# Altium PCB FreidoraAireCukiMicro_mirrored.PcbDoc
Units mm, origin at the board's own origin, x right, y up, seen from the top; angles counter-clockwise.
Board outline 92.71 x 72.39 mm, 2 copper layers (Top Layer, Bottom Layer); 65 components, 96 nets, 249 pads, 28 vias.
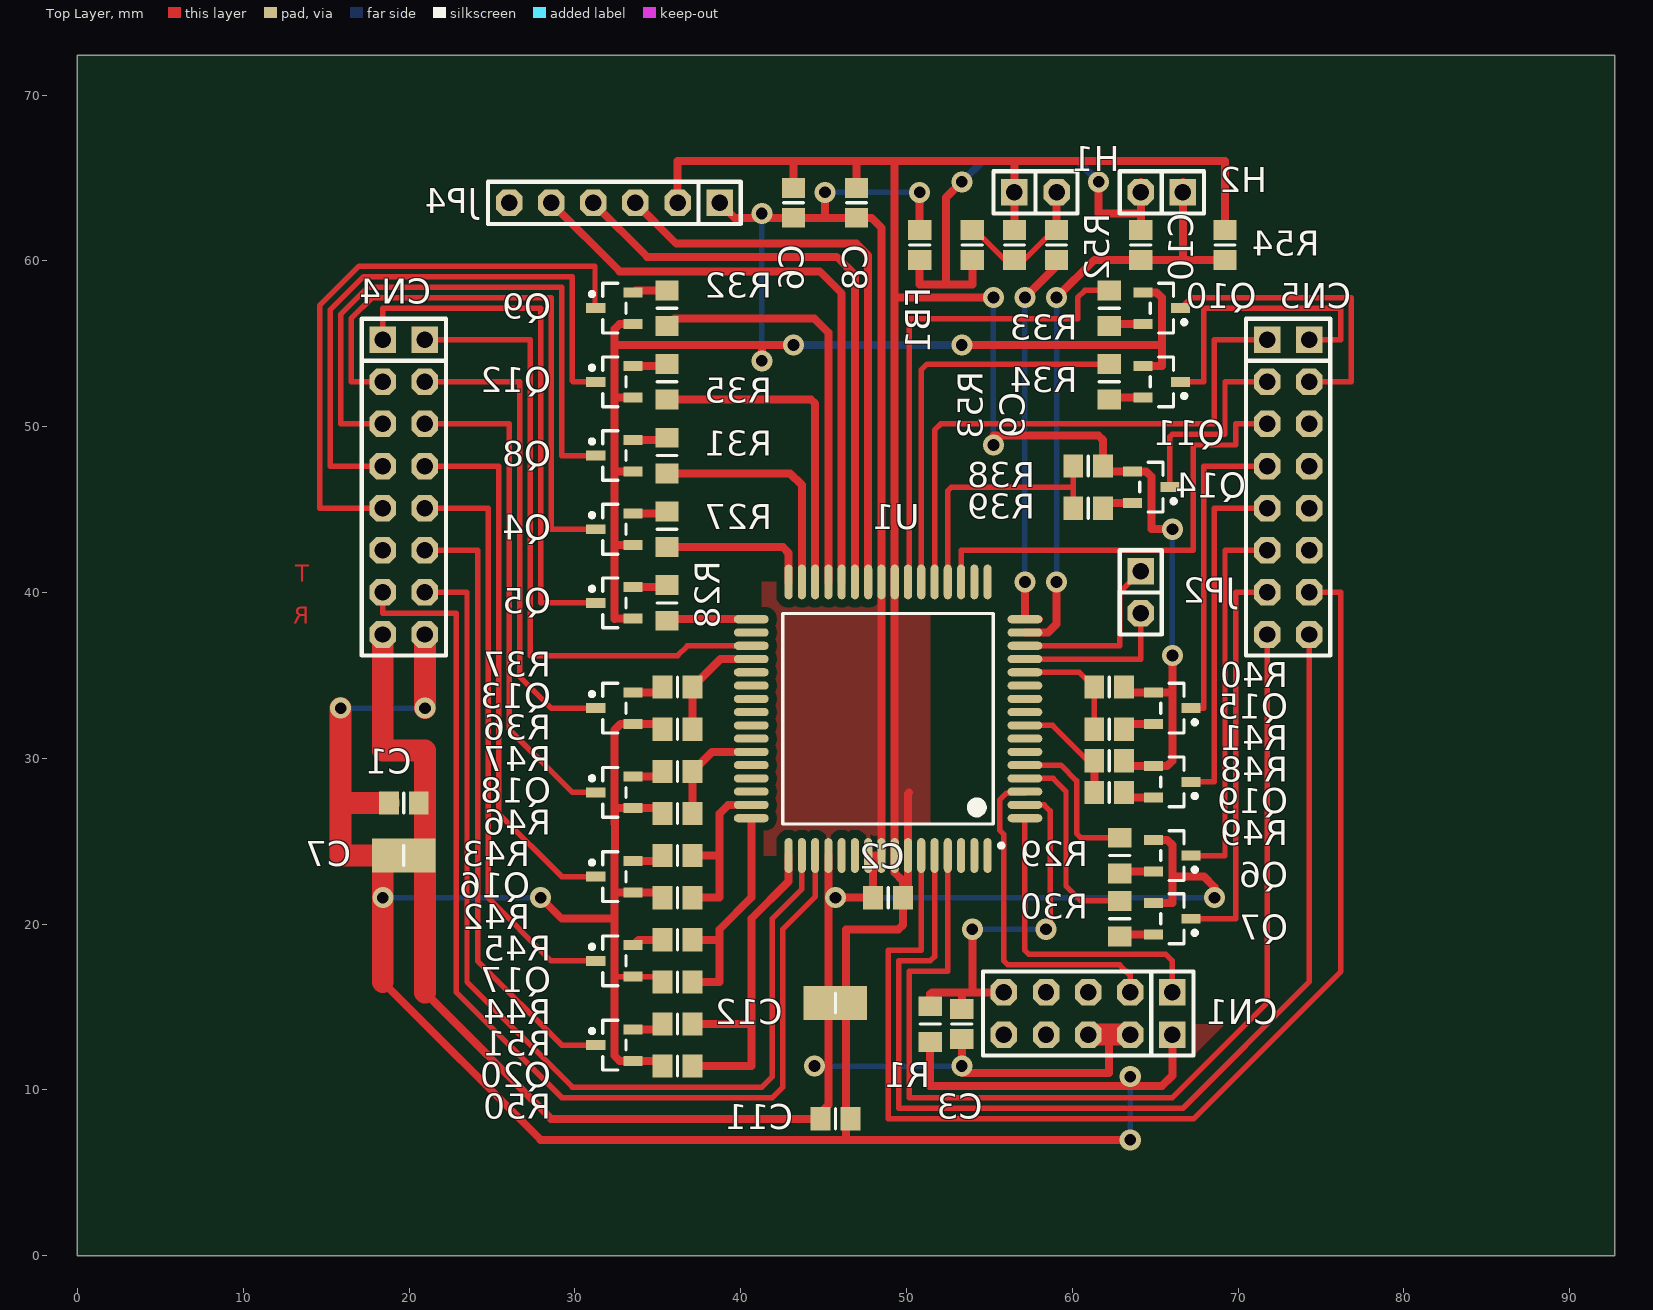
[diagram p0: Top Layer view]
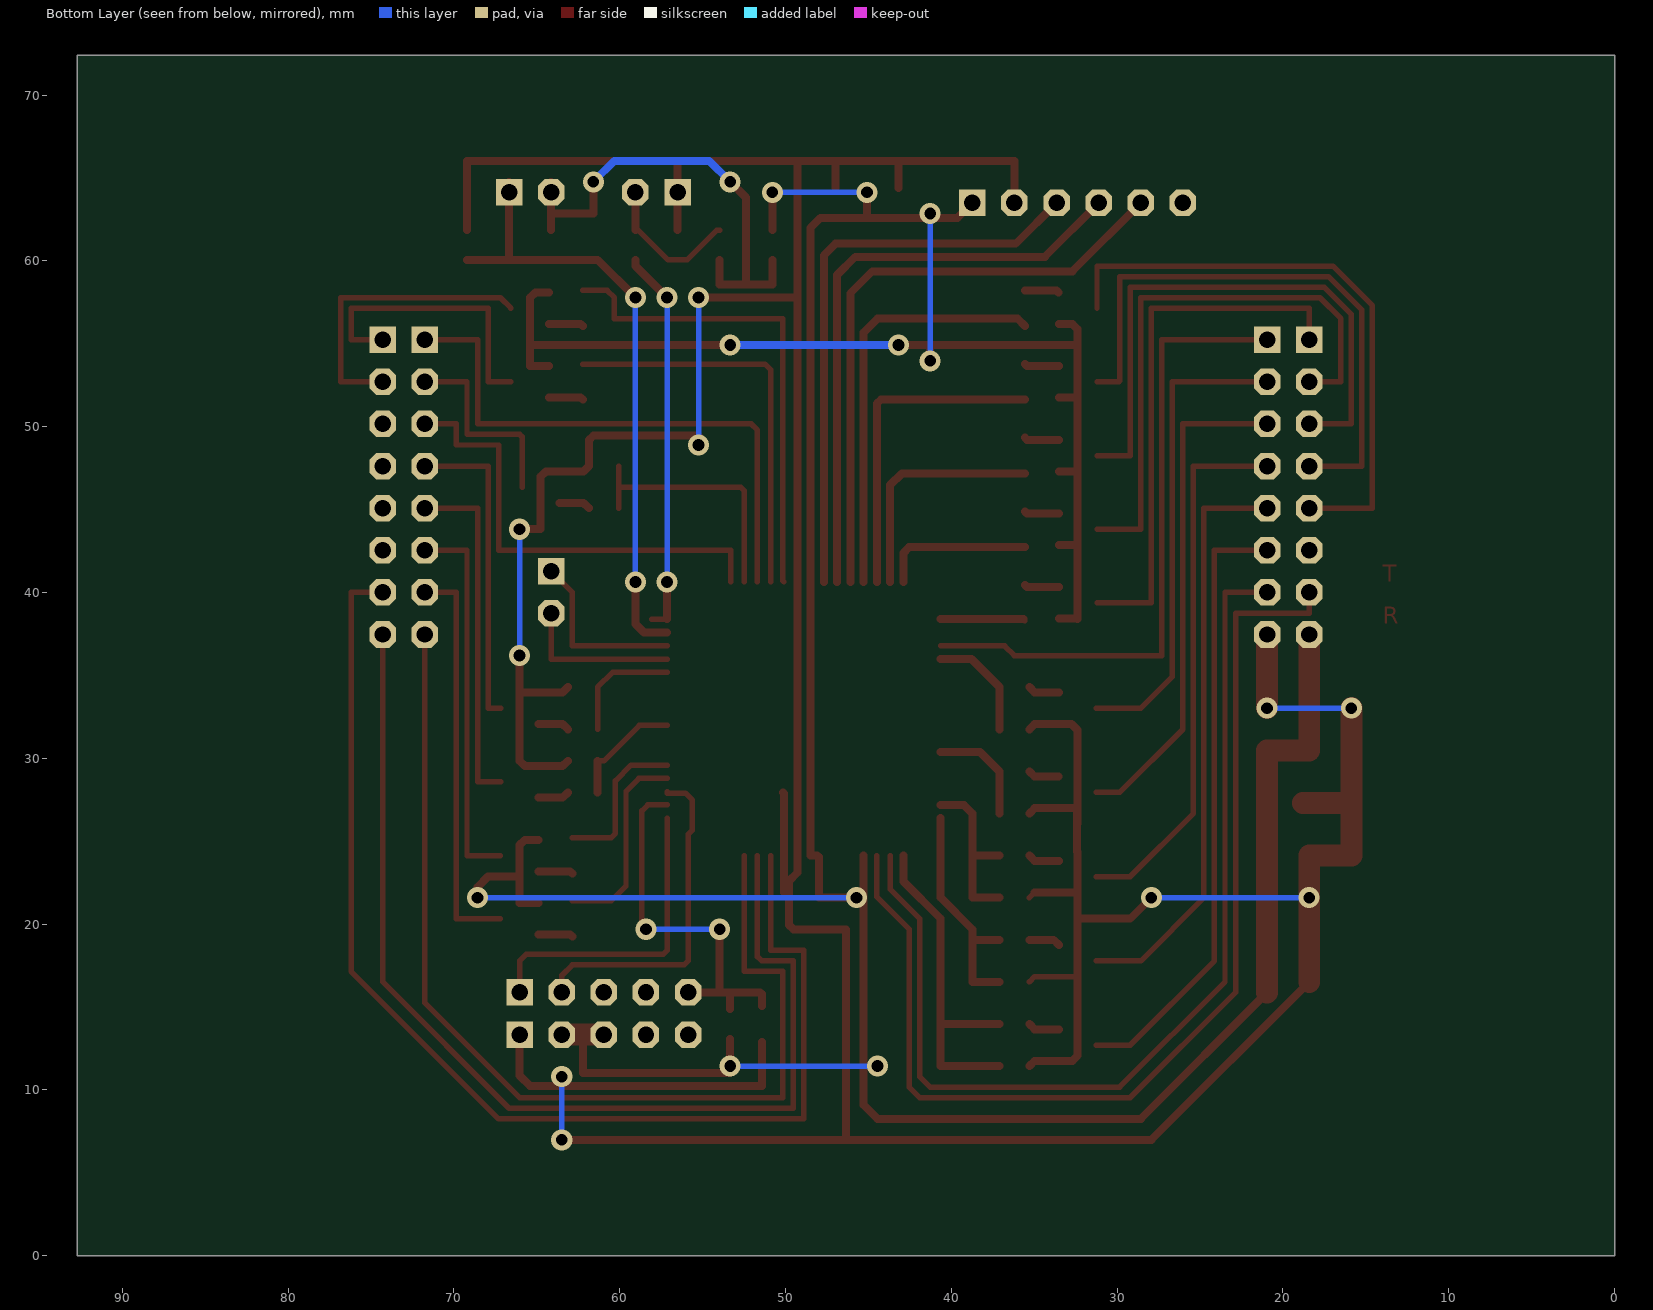
[diagram p1: Bottom Layer view, seen from below]

## Layer stack, top to bottom
Top Solder: solder mask 0.0102, Solder Resist, Dk 3.5
Top Layer: signal copper 0.0356
Dielectric1: dielectric 0.32, FR-4, Dk 4.8
Bottom Layer: signal copper 0.0356
Bottom Solder: solder mask 0.0102, Solder Resist, Dk 3.5

## Board outline
0,0 92.71,0 92.71,72.39 0,72.39

## Design rules (kind name [scope] priority, off if disabled: settings)
Clearance POLIGONOS [InPoly] p1: gap=0.508
Clearance [All] p2: gap=0.305
Clearance Clearance_1 [All] p3 off: gap=0.254
ComponentClearance [All] p1 off: gap=0.254 collisioncheckmode=3 verticalgap=0.254 showdistances=FALSE
FabricationTestPointUsage TestPointUsage [All] p1 off: valid=0 allowmultiple=FALSE
FabricationTestpoint Testpoint [All] p1: side=3 testpointundercomponent=TRUE minsize=1.016 maxsize=2.54 preferedsize=1.524 minholesize=0 maxholesize=1.016 preferedholesize=0.813 testpointgrid=0.025 allowsidetop=TRUE allowsidebottom=TRUE usegrid=TRUE gridtolerance=0
HoleSize [All] p1: absolutevalues=TRUE maxlimit=5.08 minlimit=0.025 maxpercent=80.000 minpercent=20.000
MinimumSolderMaskSliver [All] p1 off: minsoldermaskwidth=0.254
PlaneConnect [All] p1: planeconnectstyle=Relief reliefexpansion=0.508 reliefentries=4 reliefconductorwidth=0.356 reliefairgap=0.254
PolygonConnect [All] p1: connectstyle=Relief reliefconductorwidth=0.254 reliefentries=4 polygonreliefangle="90 Angle" airgapwidth=0.254
RoomDefinition FreidoraAireCukiDigLeds [InComponentClass('FreidoraAireCukiDigLeds')] p1: confinementstyle=ConfineIn formatcopy=TRUE lockcomponents=FALSE outline -271.145,-249.555 -220.345,-249.555 -220.345,-224.155 -271.145,-224.155
RoomDefinition FreidoraAireCukiMicro [InComponentClass('FreidoraAireCukiMicro')] p2: confinementstyle=ConfineIn formatcopy=TRUE lockcomponents=FALSE outline -5.08,-5.715 97.155,-5.715 97.155,74.93 -5.08,74.93
RoutingCorners [All] p1: cornerstyle=45-Degree minsetback=0.635 maxsetback=2.54
RoutingLayers [All] p1: top layer_v5=FALSE bottom layer_v5=FALSE
RoutingPriority [All] p1: routingpriority=2
RoutingVias [All] p1: holewidth=0.711 width=1.27 viastyle="Through Hole" minholewidth=0.711 minwidth=1.27 maxholewidth=0.711 maxwidth=1.397
ShortCircuit [All] p1 off: allowed=FALSE
SilkToSilkClearance [All] p1 off: silktosilkclearance=0.254
SilkToSolderMaskClearance SilkscreenOverComponentPads [IsPad] p1 off: minsilkscreentomaskgap=0.254 clearancetoexposedcopper=TRUE
SolderMaskExpansion [All] p1: expansion=0.102
Width "Width 39" [All] p1 off: maxlimit=7.62 minlimit=0.33 preferedwidth=0.991
Width "Width 96" [All] p2 off: maxlimit=7.62 minlimit=0.305 preferedwidth=2.438
Width "Width 19" [All] p3: maxlimit=7.62 minlimit=0.305 preferedwidth=0.483
Width "Width 300" [All] p4 off: maxlimit=7.62 minlimit=0.254 preferedwidth=7.62
Width "Width 12" [All] p5 off: maxlimit=7.62 minlimit=0.254 preferedwidth=0.305
Width "Width 65" [All] p6 off: maxlimit=7.62 minlimit=0.254 preferedwidth=1.651
Width "Width 150" [All] p7 off: maxlimit=7.62 minlimit=0.254 preferedwidth=3.81
Width "Width 26" [All] p8 off: maxlimit=7.62 minlimit=0.254 preferedwidth=0.66
Width "Width 13" [All] p9 off: maxlimit=7.62 minlimit=0.254 preferedwidth=0.33
Width "Width 52" [All] p10 off: maxlimit=7.62 minlimit=0.254 preferedwidth=1.321
18 further rules are at their usual default settings.

## Components (designator, comment, footprint, x,y, rotation, side; value= is the part's Value field where it differs from the comment)
C1 "100nF" C-0805_N#1 19.685,27.305 r0 top
C2 "100nF" C-0805_N#1 48.895,21.59 r180 top
C3 "1uF" C-0805_N#1 53.34,13.97 r270 top
C6 "100nF" C-0805_N#1 43.18,63.5 r270 top
C7 "100nF" C-0805_N#2 19.685,24.13 r0 top
C8 "100nF" C-0805_N#1 46.99,63.5 r270 top
C9 "100nF" C-0805_N#1 56.515,60.96 r90 top
C10 "100nF" C-0805_N#1 64.135,60.96 r270 top
C11 "10uF" C-0805_N#1 45.72,8.255 r0 top
C12 "10uF" C-0805_N#2 45.72,15.24 r0 top
CN1 "HEADER 2x5" SIP2X5 66.04,13.335 r0 top
CN4 "HEADER 8X2" SIP2X8 20.955,55.245 r90 top
CN5 "HEADER 8X2" SIP2X8 74.295,55.245 r90 top
FB1 "Ferrite bead" C-0805_N#1 50.8,60.96 r270 top
H1 "NTC 100K" SIP2 56.515,64.135 r0 top
H2 "NTC 10K" SIP2 66.675,64.135 r180 top
JP2 "UART1" SIP2 64.135,41.275 r270 top
JP4 "HEADER 6" SIP6 38.735,63.5 r180 top
Q4 "BC847" SOT23_N 32.385,43.815 r180 top
Q5 "BC847" SOT23_N 32.385,39.37 r180 top
Q6 "BC847" SOT23_N 66.04,24.13 r0 top
Q7 "BC847" SOT23_N 66.04,20.32 r0 top
Q8 "BC847" SOT23_N 32.385,48.26 r180 top
Q9 "BC847" SOT23_N 32.385,57.15 r180 top
Q10 "BC847" SOT23_N 65.405,57.15 r0 top
Q11 "BC847" SOT23_N 65.405,52.705 r0 top
Q12 "BC847" SOT23_N 32.385,52.705 r180 top
Q13 "BC857" SOT23_N 32.385,33.02 r180 top
Q14 "BC857" SOT23_N 64.77,46.355 r0 top
Q15 "BC857" SOT23_N 66.04,33.02 r0 top
Q16 "BC857" SOT23_N 32.385,22.86 r180 top
Q17 "BC857" SOT23_N 32.385,17.78 r180 top
Q18 "BC857" SOT23_N 32.385,27.94 r180 top
Q19 "BC857" SOT23_N 66.04,28.575 r0 top
Q20 "BC857" SOT23_N 32.385,12.7 r180 top
R1 "10k" R-0805_N_WAVE 51.435,13.97 r270 top
R27 "4k7" R-0805_N_WAVE 35.56,43.815 r270 top
R28 "4k7" R-0805_N_WAVE 35.56,39.37 r270 top
R29 "4k7" R-0805_N_WAVE 62.865,24.13 r90 top
R30 "4k7" R-0805_N_WAVE 62.865,20.32 r90 top
R31 "4k7" R-0805_N_WAVE 35.56,48.26 r270 top
R32 "4k7" R-0805_N_WAVE 35.56,57.15 r270 top
R33 "4k7" R-0805_N_WAVE 62.23,57.15 r90 top
R34 "4k7" R-0805_N_WAVE 62.23,52.705 r90 top
R35 "4k7" R-0805_N_WAVE 35.56,52.705 r270 top
R36 "4k7" R-0805_N 36.195,31.75 r180 top
R37 "4k7" R-0805_N 36.195,34.29 r180 top
R38 "4k7" R-0805_N 60.96,47.625 r0 top
R39 "4k7" R-0805_N 60.96,45.085 r0 top
R40 "4k7" R-0805_N 62.23,34.29 r0 top
R41 "4k7" R-0805_N 62.23,31.75 r0 top
R42 "4k7" R-0805_N 36.195,21.59 r180 top
R43 "4k7" R-0805_N 36.195,24.13 r180 top
R44 "4k7" R-0805_N 36.195,16.51 r180 top
R45 "4k7" R-0805_N 36.195,19.05 r180 top
R46 "4k7" R-0805_N 36.195,26.67 r180 top
R47 "4k7" R-0805_N 36.195,29.21 r180 top
R48 "4k7" R-0805_N 62.23,29.845 r0 top
R49 "4k7" R-0805_N 62.23,27.94 r0 top
R50 "4k7" R-0805_N 36.195,11.43 r180 top
R51 "4k7" R-0805_N 36.195,13.97 r180 top
R52 "680" R-0805_N 59.055,60.96 r270 top
R53 "10K" R-0805_N 53.975,60.96 r90 top
R54 "10K" R-0805_N 69.215,60.96 r90 top
U1 "MKE02Z64VQH4" QFP64 48.895,32.385 r90 top

## Footprints (in the part's own frame and the unit in brackets; to place one, negate y for a bottom-side part, rotate by r counter-clockwise, add the part's x,y. Pads: shape width x height; smd on the part's side, far side on the other; paste and mask are expansions set on the pad)
C-0805_N#1 [mm] "Chip Capacitor, Body 2.0x1.2mm, IPC Medium Density"
  rect 1.2x1.4 smd: 1(-0.9,0) 2(0.9,0)
  silkscreen extent 0,-0.6 0,0.6, body extent -1.1,-0.73 1.1,0.72, height 1.34
C-0805_N#2 [mm] "Chip Capacitor, Body 2.0x1.2mm, IPC Medium Density"
  rect 2.032x2.032 smd: 1(-0.9,0) 2(0.9,0)
  silkscreen extent 0,-0.6 0,0.6, body extent -1.1,-0.73 1.1,0.72, height 1.34
QFP64 [mm] "QFP, 64-Leads, Body 14x14mm, Pitch 0.8mm, IPC Medium Density"
  oval 2.1x0.489 smd: 1(-8.25,-6) 2(-8.25,-5.2) 3(-8.25,-4.4) 4(-8.25,-3.6) 5(-8.25,-2.8) 6(-8.25,-2) 7(-8.25,-1.2) 8(-8.25,-0.4) 9(-8.25,0.4) 10(-8.25,1.2) 11(-8.25,2) 12(-8.25,2.8) 13(-8.25,3.6) 14(-8.25,4.4) 15(-8.25,5.2) 16(-8.25,6) 33(8.25,6) 34(8.25,5.2) 35(8.25,4.4) 36(8.25,3.6) 37(8.25,2.8) 38(8.25,2) 39(8.25,1.2) 40(8.25,0.4) 41(8.25,-0.4) 42(8.25,-1.2) 43(8.25,-2) 44(8.25,-2.8) 45(8.25,-3.6) 46(8.25,-4.4) 47(8.25,-5.2) 48(8.25,-6)
  oval 0.489x2.1 smd: 17(-6,8.25) 18(-5.2,8.25) 19(-4.4,8.25) 20(-3.6,8.25) 21(-2.8,8.25) 22(-2,8.25) 23(-1.2,8.25) 24(-0.4,8.25) 25(0.4,8.25) 26(1.2,8.25) 27(2,8.25) 28(2.8,8.25) 29(3.6,8.25) 30(4.4,8.25) 31(5.2,8.25) 32(6,8.25) 49(6,-8.25) 50(5.2,-8.25) 51(4.4,-8.25) 52(3.6,-8.25) 53(2.8,-8.25) 54(2,-8.25) 55(1.2,-8.25) 56(0.4,-8.25) 57(-0.4,-8.25) 58(-1.2,-8.25) 59(-2,-8.25) 60(-2.8,-8.25) 61(-3.6,-8.25) 62(-4.4,-8.25) 63(-5.2,-8.25) 64(-6,-8.25)
  silkscreen extent -7.77,-6.95 6.35,6.35, body extent -7.9,-7.9 7.9,7.9, height 3.03
R-0805_N [mm] "Chip Resistor, Body 2.0x1.2mm, IPC Medium Density"
  rect 1.2x1.4 smd: 1(-0.9,0) 2(0.9,0)
  silkscreen extent 0,-0.6 0,0.6, body extent -1.1,-0.68 1.1,0.67, height 0.69
R-0805_N_WAVE [mm] "Chip Resistor, Body 2.0x1.2mm, IPC Medium Density, Wave soldering"
  rect 1.2x1.4 smd: 1(-1.075,0) 2(1.075,0)
  silkscreen extent 0,-0.6 0,0.6, body extent -1.1,-0.68 1.1,0.67, height 0.69
SIP2 [mil]
  rect 63x63 hole 39: 1(0,0)
  oct 63x63 hole 39: 2(100,0)
  silkscreen extent -50,-50 150,50
SIP2X5 [mil]
  rect 63x63 hole 39: 1(0,0) 2(0,100)
  oct 63x63 hole 39: 3(-100,0) 4(-100,100) 5(-200,0) 6(-200,100) 7(-300,0) 8(-300,100) 9(-400,0) 10(-400,100)
  silkscreen extent -450,-50 50,150, body extent -450,-48 50,148, height 336
SIP2X8 [mil]
  rect 63x63 hole 39: 1(0,0) 2(0,100)
  oct 63x63 hole 39: 3(-100,0) 4(-100,100) 5(-200,0) 6(-200,100) 7(-300,0) 8(-300,100) 9(-400,0) 10(-400,100) 11(-500,0) 12(-500,100) 13(-600,0) 14(-600,100) 15(-700,0) 16(-700,100)
  silkscreen extent -750,-50 50,150
SIP6 [mil]
  rect 63x63 hole 39: 1(0,0)
  oct 63x63 hole 39: 2(100,0) 3(200,0) 4(300,0) 5(400,0) 6(500,0)
  silkscreen extent -50,-50 550,50
SOT23_N [mm] "SOT23, 3-Leads, Body 2.9x1.3mm, Pitch 0.95mm, Lead Span 2.3mm - Reverse Pinning, IPC Medium Density"
  rect 1.15x0.6 smd: 1(-1.125,-0.95) 2(-1.125,0.95) 3(1.125,0)
  silkscreen extent -0.7,-1.5 1.47,1.5, body extent -1.4,-1.45 1.4,1.45, height 1.29

## Part data
C1 C2 C3 C6 C7 C8 C9 C10 C11 C12: library part CAP, "Non polarized capacitor"
CN1: library part "HEADER 5X2"
CN4 CN5: "HEADER DE 2 X8"
H1 H2 JP2: library part "HEADER 2"
Q4 Q5 Q6 Q7 Q8 Q9 Q10 Q11 Q12: "NPN transistor bipolar"
Q13 Q14 Q15 Q16 Q17 Q18 Q19 Q20: "PNP bipolar transistor"
R1 R27 R28 R29 R30 R31 R32 R33 R34 R35 R36 R37 R38 R39 R40 R41 R42 R43 R44 R45 R46 R47 R48 R49 R50 R51 R52 R53 R54: library part "Res SMD 0805", "Resistor SMD 0805"
U1: "IC MCU 32BIT 64KB FLASH 64QFP"

## Via types
v1: diameter 1.27, hole 0.711, Top Layer to Bottom Layer, 28 vias

## Nets (pads, with @x,y where several pads share a name; then routed paths per layer and width w, separated by ;. In a path a pad name is that pad's centre, name@x,y a point inside that pad or via, vN(x,y) a via of type N, cw(c..) or ccw(c..) an arc to the next point about the centre after c; other vN are vias at no path point)
A: R36.1 R37.1 U1.29 | length 6.8
  Top Layer w0.483: R36.1 R37.1 38.79,35.985 U1.29
AGND: C10.1 FB1.2 H2.2 R53.1 | length 29.4
  Top Layer w0.483: FB1.2 50.8,58.572 52.388,58.572 ; v1(53.34,64.77) 52.388,63.817 52.388,58.572 ; R53.1 53.975,58.572 52.388,58.572 ; v1(61.595,64.77) 61.595,62.865 64.135,62.865 ; C10.1 64.135,62.865 ; H2.2@64.135,64.77 64.135,62.865
  Bottom Layer w0.483: v1(53.34,64.77) 54.61,66.04 60.325,66.04 v1(61.595,64.77)
B: R38.1 R39.1 U1.45 | length 15.7
  Top Layer w0.33: U1.45 52.495,46.145 52.705,46.355 60.06,46.355 ; R39.1 60.06,46.355 ; R38.1 60.06,46.355
BAJAR: CN4.14 U1.14 | length 65.9
  Top Layer w0.33: CN4.14 18.415,38.735 22.86,38.735 22.86,15.875 29.21,9.525 41.91,9.525 42.55,10.165 42.55,19.69 44.495,21.635 U1.14
BUZZER: JP4.3 U1.39 | length 35
  Top Layer w0.483: JP4.3 36.119,61.036 46.99,61.036 47.695,60.331 U1.39
C: R40.1 R41.1 U1.53 | length 7.1
  Top Layer w0.33: U1.53 60.435,35.185 R40.1 R41.1
D: R42.1 R43.1 U1.18 | length 10.5
  Top Layer w0.483: R42.1 38.735,21.59 38.735,24.13 ; R43.1 38.735,24.13 ; U1.18 39.25,27.185 38.735,26.67 38.735,24.13
DIG1: 
DIG2: 
DIG3: 
DIGITO1: CN4.1 U1.30 | length 39
  Top Layer w0.33: CN4.1 27.305,55.245 27.305,36.195 36.195,36.195 36.785,36.785 U1.30
DIGITO2: CN5.2 U1.44 | length 34.5
  Top Layer w0.33: U1.44 51.695,49.79 52.07,50.165 68.58,50.165 68.58,55.245 CN5.2
DIGITO3: CN5.6 U1.46 | length 28
  Top Layer w0.33: U1.46 53.295,42.545 67.31,42.545 67.31,48.895 69.85,48.895 69.85,50.165 CN5.6
DP: R50.1 R51.1 U1.16 | length 20.7
  Top Layer w0.483: R50.1 40.64,11.43 40.64,13.97 ; R51.1 40.64,13.97 ; U1.16 42.895,22.575 40.64,20.32 40.64,13.97
E: R44.1 R45.1 U1.17 | length 13.9
  Top Layer w0.483: R44.1 38.735,16.51 38.735,19.05 ; R45.1 38.735,19.05 ; U1.17 40.645,21.595 38.735,19.685 38.735,19.05
F: R46.1 R47.1 U1.22 | length 6.6
  Top Layer w0.483: R46.1 R47.1 38.27,30.385 U1.22
FAN: JP4.4 U1.38 | length 36.7
  Top Layer w0.483: JP4.4@31.115,62.941 JP4.4 34.366,60.249 45.796,60.249 46.895,59.15 U1.38
G: R48.1 R49.1 U1.57 | length 7
  Top Layer w0.33: U1.57 58.82,31.985 60.96,29.845 R48.1
  Top Layer w0.483: R49.1 R48.1
GND: C1.2 C2.2 C3.2 C6.2 C7.2 C8.2 C11.1 C12.1 CN1.3 CN1.5 CN4.16 FB1.1 JP4.1 Q4.2 Q5.2 Q6.2 Q7.2 Q8.2 Q9.2 Q10.2 Q11.2 Q12.2 U1.9 U1.10 U1.13 U1.40 | length 259.9
  Top Layer w0.483: 20.955,15.875 28.575,8.255 44.45,8.255 45.295,9.1 v1@45.295,21.59 ; 32.385,54.926 41.275,54.926 ; Q5.2 32.405,38.42 32.385,38.4 32.385,42.865 ; Q4.2 32.385,42.865 ; Q8.2 32.385,47.31 ; Q12.2 32.385,51.755 ; Q9.2 32.705,56.2 32.385,55.88 32.385,51.755 ; JP4.1 39.635,62.6 v1@41.275,62.6 ; v1(41.275,53.975) 41.275,54.926 ; v1(41.275,62.865) v1@41.275,62.6 ; v1(43.18,54.926) 41.275,54.926 ; v1(45.085,64.135) 45.085,62.6 ; U1.13 v1@45.295,21.59 ; FB1.1 v1(50.8,64.135) ; C3.2 53.34,11.024 62.23,11.024 62.23,13.335 ; v1(53.34,54.926) 65.405,54.926 ; Q11.2 65.405,53.655 65.405,57.785 65.09,58.1 Q10.2 ; Q7.2 66.04,21.27 66.04,22.86 ; Q6.2 65.725,25.08 66.04,24.765 66.04,22.86 ; v1(68.58,21.59) 68.58,22.225 67.945,22.86 66.04,22.86 ; 32.385,42.865 32.385,47.31 ; 32.385,47.31 32.385,51.755 ; v1@41.275,62.6 C6.2 45.085,62.6 ; 45.085,62.6 C8.2 47.89,62.6 48.495,61.995 U1.40 U1.9 48.095,24.135 47.995,24.035 C2.2 v1@45.295,21.59
  Top Layer w1.321: CN4.16 18.415,30.48 20.955,30.48 20.955,15.875 ; CN1.5 62.23,13.335 CN1.3
  Bottom Layer w0.33: v1(41.275,53.975) v1(41.275,62.865) ; v1(44.45,11.43) v1(53.34,11.43) ; v1(45.085,64.135) v1(50.8,64.135) ; v1(45.72,21.59) v1(68.58,21.59)
  Bottom Layer w0.483: v1@43.496,54.926 v1(53.34,54.926)
HEAT: JP4.5 U1.37 | length 37.2
  Top Layer w0.483: JP4.5 32.704,59.371 44.769,59.371 46.095,58.045 U1.37
LED1: R27.2 U1.33 | length 9.2
  Top Layer w0.483: R27.2 42.545,42.74 42.895,42.39 U1.33
LED1_DR: CN4.4 Q4.3 | length 34.9
  Top Layer w0.33: CN4.4 16.51,52.705 16.51,56.515 17.78,57.785 28.575,57.785 28.575,43.815 Q4.3@31.215,43.815
LED2: R28.2 U1.32 | length 5.1
  Top Layer w0.33: R28.2 R28.2@35.65,38.385
  Top Layer w0.483: R28.2@35.65,38.385 U1.32
LED2_DR: CN4.2 Q5.3 | length 32.5
  Top Layer w0.33: CN4.2 18.415,57.15 27.94,57.15 27.94,39.37 Q5.3@31.215,39.37
LED3: R29.2 U1.60 | length 9.4
  Top Layer w0.33: U1.60 59.315,29.585 60.26,28.64 60.26,25.465 60.52,25.205 R29.2
LED3_DR: CN5.12 Q6.3 | length 23
  Top Layer w0.33: Q6.3@67.21,24.13 69.215,24.13 69.215,42.545 CN5.12
LED4: R30.2 U1.61 | length 12.1
  Top Layer w0.33: U1.61 58.845,28.785 59.625,28.005 59.625,22.29 60.52,21.395 R30.2
LED4_DR: CN5.14 Q7.3 | length 24.2
  Top Layer w0.33: Q7.3@67.21,20.32 69.85,20.32 69.85,40.005 CN5.14
LED5: R31.2 U1.34 | length 14.3
  Top Layer w0.483: R31.2 42.985,47.185 43.695,46.475 U1.34
LED5_DR: CN4.6 Q8.3 | length 35.3
  Top Layer w0.33: CN4.6 15.875,50.165 15.875,56.778 17.517,58.42 29.21,58.42 29.21,48.26 Q8.3@31.215,48.26
LED6: R32.2 U1.36 | length 25.3
  Top Layer w0.483: R32.2 36,56.515 44.45,56.515 45.295,55.67 U1.36
LED6_DR: CN4.10 Q9.3 | length 36.2
  Top Layer w0.33: CN4.10 14.605,45.085 14.605,57.304 16.991,59.69 31.215,59.69 ; 31.115,59.69 31.215,59.59 Q9.3@31.215,57.15
LED7: R33.2 U1.42 | length 29.4
  Top Layer w0.33: U1.42 50.165,40.705 50.165,56.515 60.325,56.515 60.325,57.785 60.765,58.225 R33.2
LED7_DR: CN5.3 Q10.3 | length 18.1
  Top Layer w0.33: Q10.3@66.575,57.15 67.21,57.785 76.835,57.785 76.835,52.705 CN5.3
LED8: R34.2 U1.43 | length 24.3
  Top Layer w0.33: U1.43 50.895,53.435 51.24,53.78 R34.2
LED8_DR: CN5.1 Q11.3 | length 17.9
  Top Layer w0.33: Q11.3@66.575,52.705 67.945,52.705 67.945,57.15 76.2,57.15 76.2,55.245 CN5.1
LED9: R35.2 U1.35 | length 19.8
  Top Layer w0.483: R35.2 44.255,51.63 44.495,51.39 U1.35
LED9_DR: CN4.8 Q12.3 | length 35.7
  Top Layer w0.33: CN4.8 15.24,47.625 15.24,57.041 17.254,59.055 29.845,59.055 29.845,52.755 29.895,52.705 Q12.3@31.215,52.705
MODO: CN5.16 U1.4 | length 63.1
  Top Layer w0.33: U1.4 52.495,17.145 50.165,17.145 50.165,9.525 66.04,9.525 71.755,15.24 CN5.16
NetC9_1: C9.1 H1.2 R52.1 R53.2 | length 8.8
  Top Layer w0.33: R53.2 54.14,61.86 55.94,60.06 C9.1 57.09,60.06 58.89,61.86 R52.1
  Top Layer w0.483: R52.1 H1.2
NetDG1_1: 
NetDG1_2: 
NetDG1_3: 
NetDG1_4: 
NetDG1_5: 
NetDG1_7: 
NetDG1_10: 
NetDG1_11: 
NetJP2_1: JP2.1 U1.51 | length 10.7
  Top Layer w0.33: U1.51 62.865,36.785 62.865,40.005 JP2.1
NetJP2_2: JP2.2 U1.52 | length 9.7
  Top Layer w0.33: U1.52 64.135,35.985 JP2.2
NetLED1_1: 
NetLED2_1: 
NetLED3_1: 
NetLED4_1: 
NetLED5_1: 
NetLED6_1: 
NetLED7_1: 
NetLED8_1: 
NetLED9_1: 
NetQ1_1: 
NetQ2_1: 
NetQ3_1: 
NetQ4_1: Q4.1 R27.1 | length 2.1
  Top Layer w0.483: Q4.1 35.435,44.765 R27.1
NetQ5_1: Q5.1 R28.1 | length 2.1
  Top Layer w0.483: Q5.1 35.435,40.32 R28.1
NetQ6_1: Q6.1 R29.1 | length 2.1
  Top Layer w0.483: R29.1 62.99,23.18 Q6.1
NetQ7_1: Q7.1 R30.1 | length 2.1
  Top Layer w0.483: R30.1 62.99,19.37 Q7.1
NetQ8_1: Q8.1 R31.1 | length 2.1
  Top Layer w0.483: Q8.1 35.435,49.21 R31.1
NetQ9_1: Q9.1 R32.1 | length 2.1
  Top Layer w0.483: Q9.1@33.535,58.1 33.66,58.225 R32.1
NetQ10_1: Q10.1 R33.1 | length 2.1
  Top Layer w0.483: R33.1 62.355,56.2 Q10.1
NetQ11_1: Q11.1 R34.1 | length 2.1
  Top Layer w0.483: R34.1 62.355,51.755 Q11.1
NetQ12_1: Q12.1 R35.1 | length 2.1
  Top Layer w0.483: Q12.1 35.435,53.655 R35.1
NetQ13_1: Q13.1 R37.2 | length 1.9
  Top Layer w0.483: Q13.1 34.975,33.97 R37.2
NetQ14_1: Q14.1 R39.2 | length 1.9
  Top Layer w0.483: R39.2 62.18,45.405 Q14.1
NetQ15_1: Q15.1 R41.2 | length 1.9
  Top Layer w0.483: R41.2 63.45,32.07 Q15.1
NetQ16_1: Q16.1 R43.2 | length 1.9
  Top Layer w0.483: Q16.1 34.975,23.81 R43.2
NetQ17_1: Q17.1 R45.2 | length 1.9
  Top Layer w0.483: Q17.1 33.83,19.05 R45.2
NetQ18_1: Q18.1 R47.2 | length 1.9
  Top Layer w0.483: Q18.1@33.535,28.89 34.975,28.89 R47.2
NetQ19_1: Q19.1 R49.2 | length 1.9
  Top Layer w0.483: R49.2 63.445,27.625 Q19.1
NetQ20_1: Q20.1 R51.2 | length 1.9
  Top Layer w0.483: Q20.1 34.975,13.65 R51.2
NTC_10K: C10.2 H2.1 R54.1 U1.50 | length 39.9
  Top Layer w0.483: U1.50 58.54,37.585 59.055,38.1 v1(59.055,40.64) ; v1(59.055,57.785) 61.33,60.06 C10.2 ; 61.86,60.06 66.675,60.06 ; H2.1@66.675,64.77 66.675,60.06 ; R54.1 66.675,60.06
  Bottom Layer w0.33: v1(59.055,40.64) v1(59.055,57.785)
ONOFF: CN5.13 U1.6 | length 74.9
  Top Layer w0.33: U1.6 50.895,18.415 48.895,18.415 48.895,8.255 67.31,8.255 76.2,17.145 76.2,22.225 ; CN5.13 76.2,40.005 76.2,20.955
RESET: C3.1 CN1.10 R1.1 U1.63 | length 23.4
  Top Layer w0.33: U1.63 58.3,27.185 58.665,26.82 58.665,19.93 v1(58.42,19.685)
  Top Layer w0.483: R1.1 51.435,15.777 51.533,15.875 53.34,15.875 ; C3.1 53.34,15.875 ; v1(53.975,19.685) 53.975,15.875 ; CN1.10 53.975,15.875 ; 53.34,15.875 53.975,15.875
  Bottom Layer w0.33: v1(53.975,19.685) v1(58.42,19.685)
SEG_A: CN4.3 Q13.3 | length 28.9
  Top Layer w0.33: CN4.3 26.67,52.705 26.67,34.925 28.575,33.02 Q13.3
SEG_B: CN5.4 Q14.3 | length 12.1
  Top Layer w0.33: Q14.3 65.895,49.385 66.04,49.53 69.215,49.53 69.215,52.705 CN5.4
SEG_C: CN5.8 Q15.3 | length 19.2
  Top Layer w0.33: Q15.3 67.945,33.02 67.945,47.625 CN5.8
SEG_D: CN4.7 Q16.3 | length 32.8
  Top Layer w0.33: CN4.7 25.4,47.625 25.4,26.67 29.21,22.86 Q16.3
SEG_DP: CN4.11 Q20.3 | length 37.2
  Top Layer w0.33: CN4.11 24.13,42.545 24.13,17.78 29.21,12.7 Q20.3
SEG_E: CN4.9 Q17.3 | length 35.4
  Top Layer w0.33: CN4.9 24.765,45.085 24.765,21.59 28.575,17.78 Q17.3
SEG_F: CN4.5 Q18.3 | length 30.3
  Top Layer w0.33: CN4.5 26.035,50.165 26.035,31.75 29.845,27.94 Q18.3
SEG_G: CN5.10 Q19.3 | length 21.1
  Top Layer w0.33: Q19.3 68.58,28.575 68.58,45.085 CN5.10
SUBIR: CN4.13 U1.15 | length 61.4
  Top Layer w0.33: CN4.13 23.495,40.005 23.495,16.51 29.845,10.16 41.275,10.16 41.915,10.8 41.915,20.325 43.695,22.105 U1.15
SWDCLK: CN1.4 U1.62 | length 20.6
  Top Layer w0.33: U1.62 57.145,27.899 56.044,27.899 55.625,27.481 55.625,25.671 55.88,25.416 55.88,17.78 56.12,17.54 62.865,17.54 63.5,16.905 CN1.4
SWDIO: CN1.2 U1.64 | length 19
  Top Layer w0.33: U1.64 57.145,22.225 57.15,22.22 57.15,18.415 57.39,18.175 65.645,18.175 66.04,17.78 CN1.2
TEMPERATURA: R52.2 U1.49 | length 23.4
  Top Layer w0.33: U1.49 U1.49@58.07,38.385
  Top Layer w0.483: U1.49 57.145,40.635 v1(57.15,40.64) ; v1(57.15,57.785) 59.055,59.69 R52.2
  Bottom Layer w0.33: v1(57.15,40.64) v1(57.15,57.785)
TIEMPO: CN5.15 U1.5 | length 67.4
  Top Layer w0.33: U1.5 51.695,18.04 51.435,17.78 49.53,17.78 49.53,8.89 66.675,8.89 74.295,16.51 74.295,19.05 ; 74.295,17.78 CN5.15
VCC: C1.1 C2.1 C6.1 C7.1 C8.1 C9.2 C11.2 C12.2 CN1.1 CN4.15 H1.1 JP4.2 Q13.2 Q14.2 Q15.2 Q16.2 Q17.2 Q18.2 Q19.2 Q20.2 R1.2 R36.2 R38.2 R40.2 R42.2 R44.2 R46.2 R48.2 R50.2 R54.2 U1.7 U1.8 U1.41 | length 323.9
  Top Layer w0.33: 32.389,16.83 Q17.2 34.975,16.83 R44.2 ; R42.2@34.975,21.91 R42.2
  Top Layer w0.483: 18.415,16.51 27.94,6.985 46.355,6.985 ; v1(27.94,21.59) 29.21,20.32 32.389,20.32 ; R42.2@34.975,21.91 Q16.2 32.389,21.91 ; R50.2 34.975,11.75 Q20.2 32.7,11.75 32.389,12.061 32.389,16.83 32.389,20.32 ; R46.2 34.975,26.99 Q18.2 32.411,26.99 32.411,26.035 ; R36.2 34.975,32.07 Q13.2 32.755,32.07 32.389,31.704 32.389,26.057 32.411,26.035 ; JP4.2 36.195,66.04 43.18,66.04 ; C6.1 43.18,66.04 ; C8.1 46.99,66.04 ; 50.165,27.94 50.095,27.87 U1.7 50.095,21.89 C2.1 ; R1.2 51.435,10.236 65.405,10.236 66.04,10.871 CN1.1 ; v1(55.245,48.895) 55.245,49.454 61.595,49.454 61.86,49.189 R38.2 62.18,47.305 Q14.2 64.455,47.305 64.77,46.99 64.77,43.815 v1(66.04,43.815) ; v1(55.245,57.785) 49.295,57.785 ; C9.2 H1.1@56.515,64.77 ; R48.2 63.45,29.525 Q19.2 65.72,29.525 66.04,29.845 v1(66.04,36.195) ; R40.2 63.45,33.97 Q15.2 66.04,33.97 ; v1(63.5,6.985) 46.355,6.985 ; R54.2 69.215,66.04 56.515,66.04 ; 32.389,20.32 32.389,21.91 ; 32.389,21.91 32.389,24.358 32.411,24.381 32.411,26.035 ; 43.18,66.04 46.99,66.04 ; 46.355,6.985 46.355,19.685 49.53,19.685 49.795,19.95 C2.1 ; 46.99,66.04 49.295,66.04 ; 49.295,57.785 49.295,66.04 ; 49.295,57.785 U1.41 U1.8 49.295,23.095 49.795,22.595 C2.1 ; 49.295,66.04 56.515,66.04 ; H1.1@56.515,64.77 56.515,66.04 ; H1.1@56.515,64.77 56.515,66.04
  Top Layer w1.321: v1(15.875,33.02) 15.875,27.305 ; 18.415,16.51 18.415,24.13 15.875,24.13 15.875,27.305 ; C1.1 15.875,27.305 ; v1(20.955,33.02) CN4.15
  Bottom Layer w0.33: v1(15.875,33.02) v1(20.955,33.02) ; v1(18.415,21.59) v1(27.94,21.59) ; v1(55.245,48.895) v1(55.245,57.785) ; v1(63.5,6.985) v1(63.5,10.795) ; v1(66.04,36.195) v1(66.04,43.815)
pads on no net: CN1.6 CN1.7 CN1.8 CN1.9 CN4.12 CN5.5 CN5.7 CN5.9 CN5.11 JP4.6 U1.1 U1.2 U1.3 U1.11 U1.12 U1.19 U1.20 U1.21 U1.23 U1.24 U1.25 U1.26 U1.27 U1.28 U1.31 U1.47 U1.48 U1.54 U1.55 U1.56 U1.58 U1.59

## Polygon pours and split planes (outlines as drawn)
VCC on Top Layer "Top Layer-No Net" (solid, pour order 7): 49.295,38.735 51.435,38.735 51.435,26.035 49.295,26.035 49.295,38.735
GND on Top Layer "Top Layer-No Net" (solid, pour order 5): 48.495,40.635 48.49,40.64 41.275,40.64 41.275,24.13 48.895,24.13 48.895,40.64 48.89,40.635 48.495,40.635
no net on Top Layer "Top Layer-No Net" (solid, pour order 3): 67.31,12.7 67.31,13.97 69.215,13.97 67.31,12.065

## Other copper
Top Layer:
  text "T" at 13.97,40.64 h1.02
  text "R" at 13.97,38.1 h1.02

## Silkscreen, mask and mechanical layers (free items; w line width, h text height)
Mechanical 1:
  lines w0.254: 12.899,1.143 12.899,1.651 ; 14.423,0.889 12.899,1.397 ; 14.423,1.905 12.899,1.397 ; 41.795,1.397 12.899,1.397 ; 52.003,1.397 80.899,1.397 ; 79.375,0.889 80.899,1.397 ; 79.375,1.905 80.899,1.397 ; 80.899,1.143 80.899,1.651 ; 87.884,6.453 88.392,4.929 ; 87.884,65.405 88.392,66.929 ; 88.138,4.929 88.646,4.929 ; 88.138,66.929 88.646,66.929 ; 88.392,30.825 88.392,4.929 ; 88.392,41.033 88.392,66.929 ; 88.9,6.453 88.392,4.929 ; 88.9,65.405 88.392,66.929
  text "62 (mm)" at 89.306,31.079 h1.52 r90
  text "68 (mm)" at 42.049,0.483 h1.52
Mechanical 4:
  lines w0.254: 12.7,26.67 12.7,52.705 ; 12.7,27.305 ccw(c34.953,27.333) 34.98,5.08 ; 12.7,50.165 cw(c31.433,51.752) 20.649,67.152 ; 20.55,67.08 72.795,67.08 ; 34.925,5.08 59.69,5.08 ; 58.42,5.08 ccw(c58.448,27.333) 80.7,27.305 ; 72.751,67.152 cw(c61.968,51.752) 80.7,50.165 ; 80.7,26.67 80.7,53.92
Mechanical 13:
  circle w0.254: c47.97,10.21 r0.5
  circle w0.254: c49.7,55.08 r1
  circle w0.254: c43.7,55.08 r1
  circle w0.254: c55.2,53.08 r1
  circle w0.254: c38.2,53.08 r1
  circle w0.254: c59.7,50.08 r1
  circle w0.254: c33.7,50.08 r1
  circle w0.254: c66.95,29.825 r0.5
  circle w0.254: c26.45,38.08 r0.5
  circle w0.254: c46.7,38.08 r20.25
  circle w0.254: c46.7,50.08 r1
  circle w0.254: c46.7,64.08 r3
  circle w0.254: c15.7,31.08 r3
  circle w0.254: c77.7,31.08 r3
  circle w0.254: c77.7,31.08 r1.75
  circle w0.254: c15.7,31.08 r1.75
  circle w0.254: c46.7,64.08 r1.75
  lines w0.254: 80.645,53.975 80.7,53.92 ; 35.45,31.08 35.45,45.08 57.95,45.08 57.95,31.08 35.45,31.08